# Altium PCB PCBpoprawiony.PcbDoc
Units mil, origin at the board's own origin, x right, y up, seen from the top; angles counter-clockwise.
Board outline 3100 x 3050 mil, 2 copper layers (Top Layer, Bottom Layer); 80 components, 68 nets, 328 pads, 71 vias.
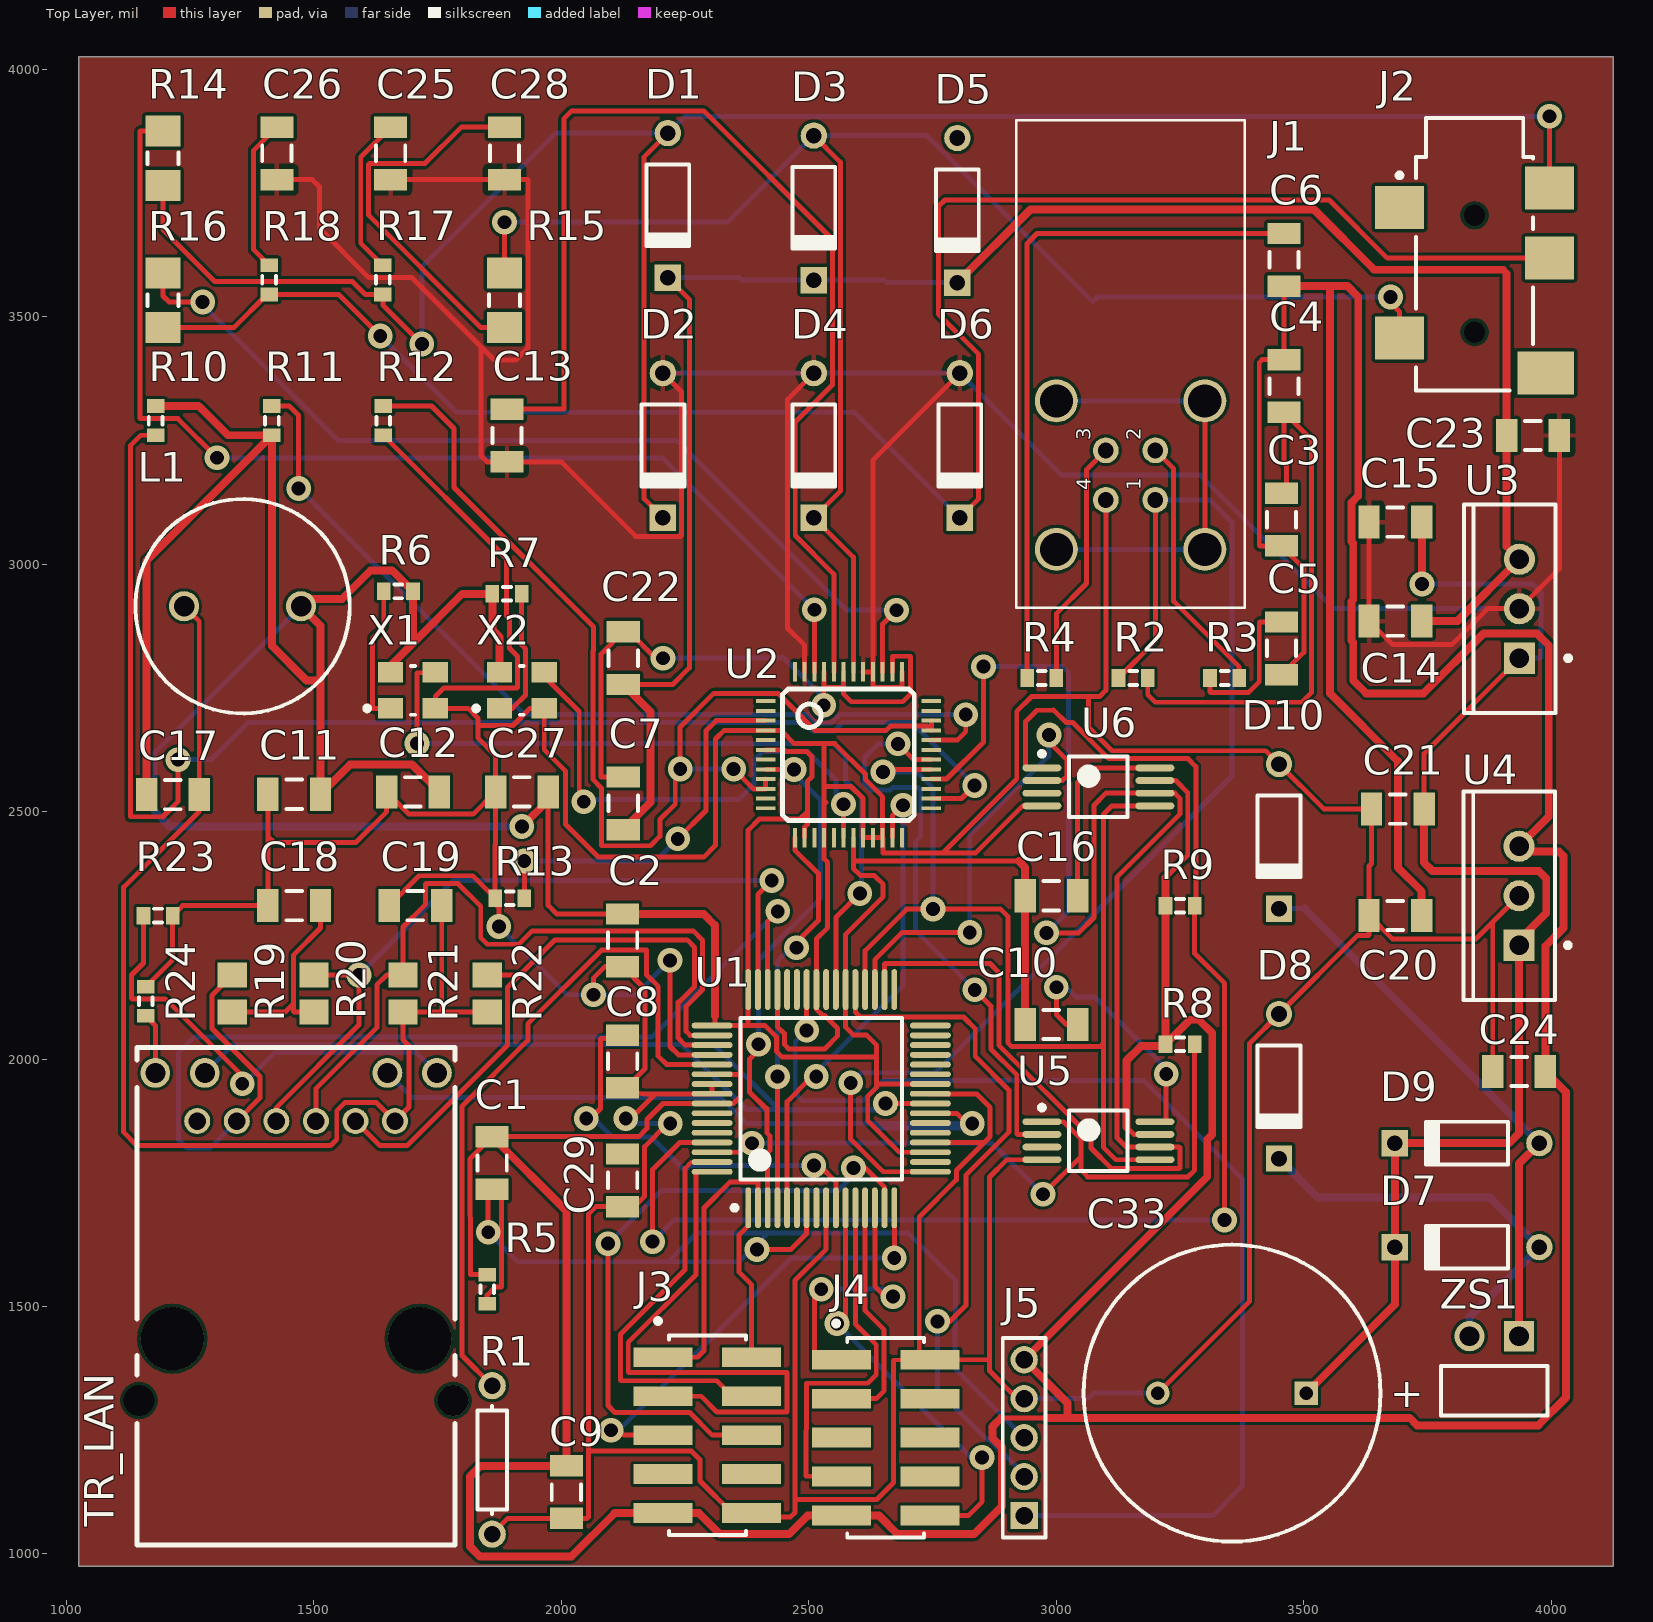
[diagram p0: Top Layer view]
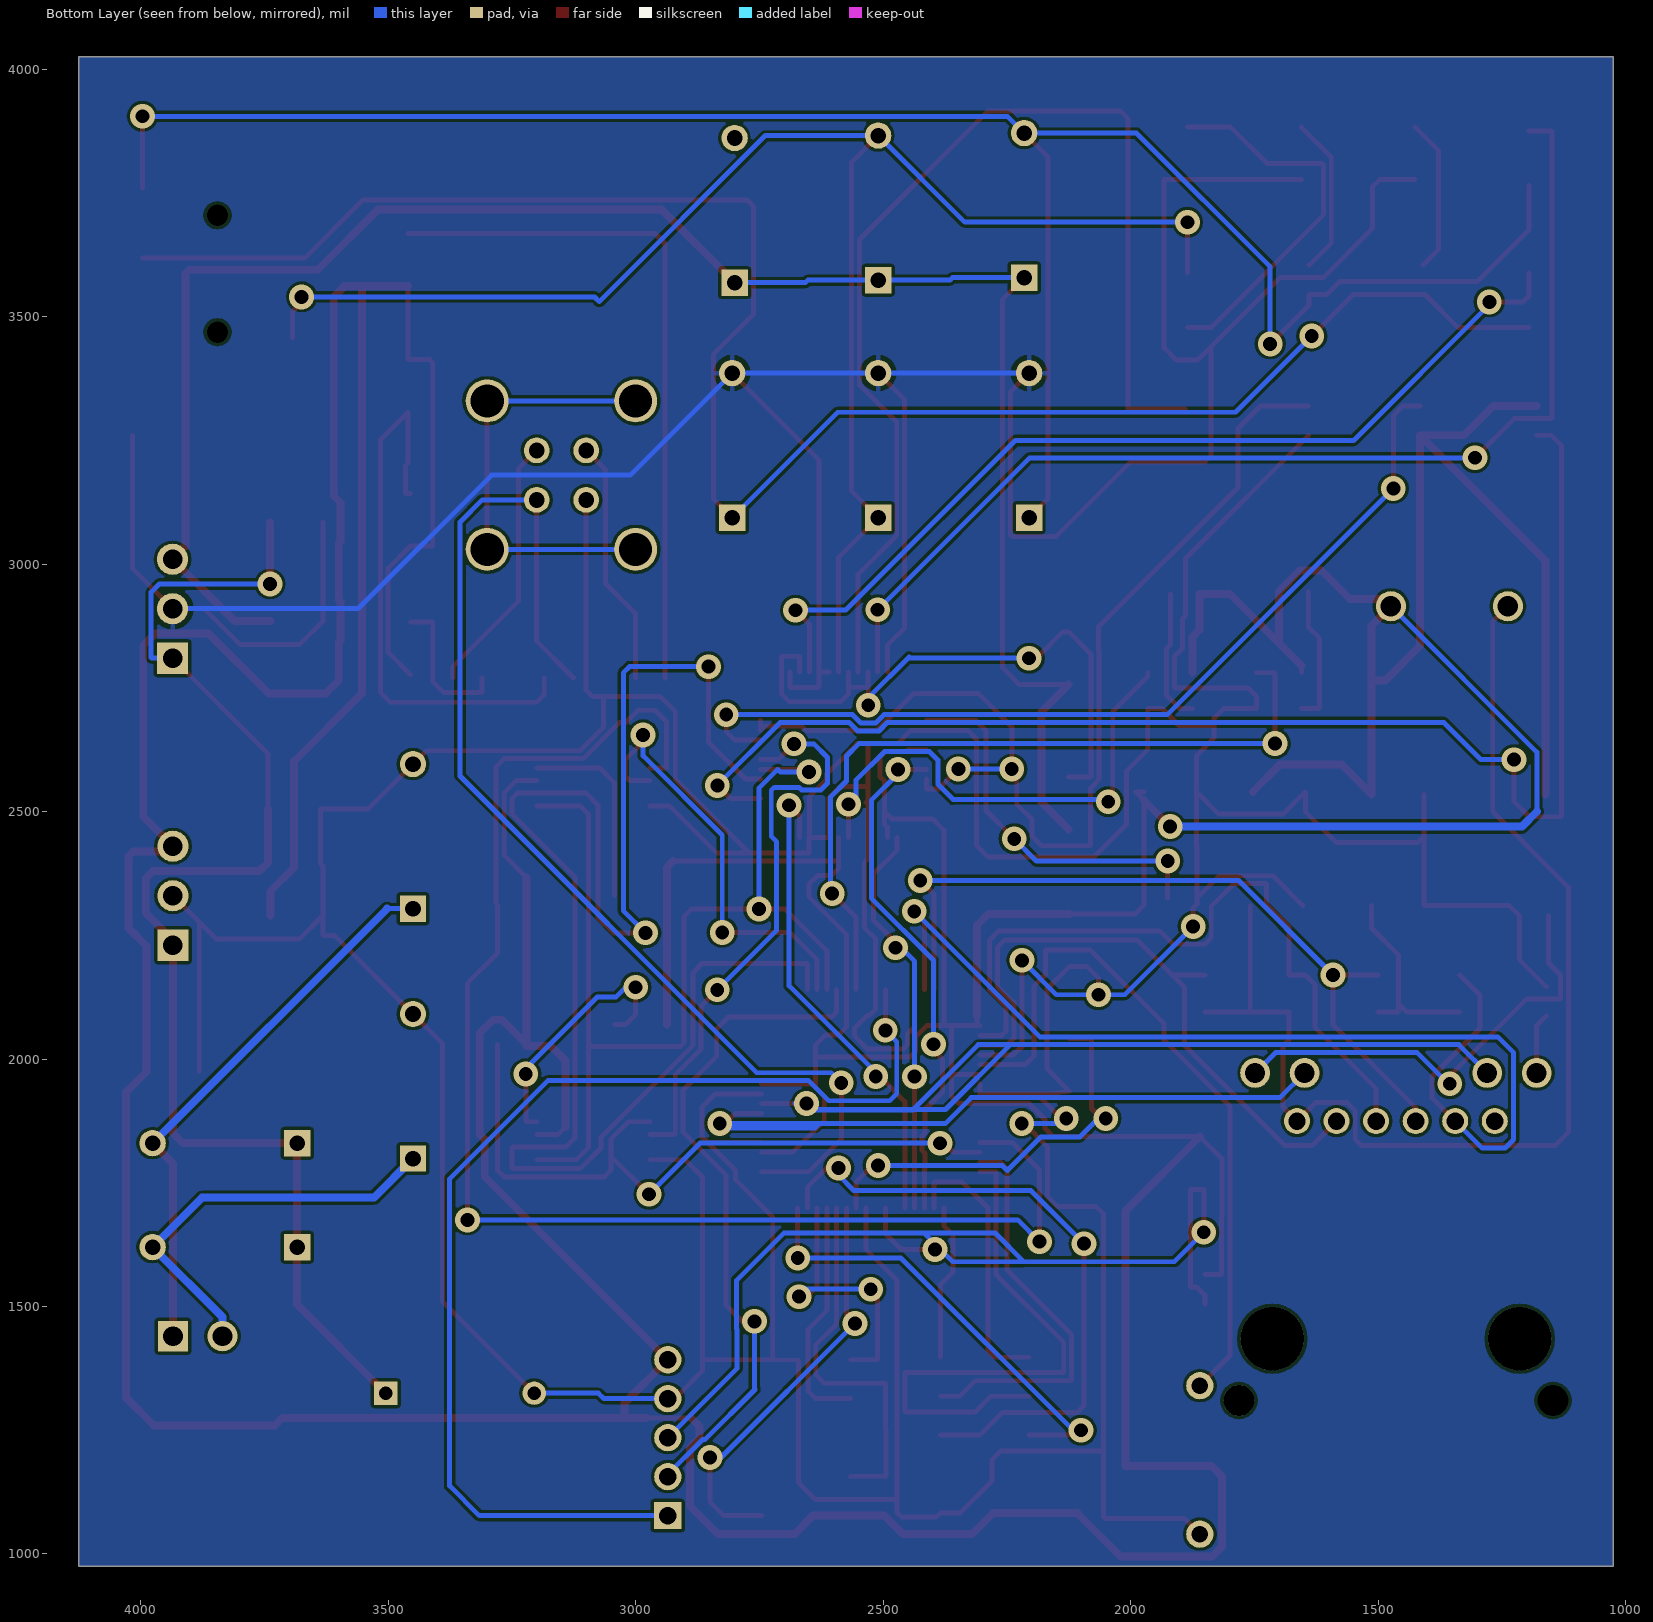
[diagram p1: Bottom Layer view, seen from below]

## Layer stack, top to bottom
Top Solder: solder mask 0.4, Solder Resist, Dk 3.5
Top Layer: signal copper 1.4
Dielectric 1: dielectric 12.6, FR-4, Dk 4.8
Bottom Layer: signal copper 1.4
Bottom Solder: solder mask 0.4, Solder Resist, Dk 3.5

## Board outline
4125,4025 1025,4025 1025,975 4125,975

## Design rules (kind name [scope] priority, off if disabled: settings)
Clearance [All] p1: gap=6 ignorepadtopadclearanceinfootprint=FALSE
HoleSize [All] p1: absolutevalues=TRUE maxlimit=128 minlimit=1 maxpercent=80.000 minpercent=20.000
MinimumSolderMaskSliver [All] p1: minsoldermaskwidth=2
PolygonConnect [All] p1: connectstyle=Relief reliefconductorwidth=10 reliefentries=4 polygonreliefangle="90 Angle" airgapwidth=10
RoutingVias [All] p1: holewidth=28 width=50 viastyle="Through Hole" minholewidth=28 minwidth=50 maxholewidth=28 maxwidth=50
SMDNeckDown [All] p1 off: percent=50.000
SilkToSilkClearance [All] p1: silktosilkclearance=0
SilkToSolderMaskClearance [IsPad] p1: minsilkscreentomaskgap=2 clearancetoexposedcopper=TRUE
SolderMaskExpansion [All] p1: expansion=2
Width [All] p1: maxlimit=24 minlimit=6 preferedwidth=10
26 further rules are at their usual default settings.

## Components (designator, comment, footprint, x,y, rotation, side; value= is the part's Value field where it differs from the comment)
C1 "100n" C1206 1860,1790 r90 top
C2 "100n" C1206 2123.66,2240 r90 top
C3 "100n" C1206 3455,3090 r90 top
C4 "100n" C1206 3460,3360 r90 top
C5 "100n" C1206 3455,2830 r90 top
C6 "100n" C1206 3460,3615 r90 top
C7 "100n" C1206 2125,2516.85 r90 top
C8 "100n" C1206 2123.66,1995.15 r90 top
C9 "100n" C1206 2010,1125 r90 top
C10 "100n" C1206 2990,2070 r0 top
C11 "100n" C1206 1460,2535 r0 top
C12 "100n" C1206 1700,2540 r0 top
C13 "100n" C1206 1890,3260 r90 top
C14 "100n" C1206 3685,2885 r0 top
C15 "100n" C1206 3685,3085 r0 top
C16 "100n" C1206 2990,2330 r0 top
C17 "100n" C1206 1215,2534.34 r0 top
C18 "100n" C1206 1460,2310 r0 top
C19 "100n" C1206 1705,2310 r0 top
C20 "100n" C1206 3685,2290 r0 top
C21 "100n" C1206 3690,2505 r0 top
C22 "10u" C1206 2125,2810 r90 top
C23 "10u" C1206 3963.15,3260 r0 top
C24 "10u" C1206 3935,1975 r0 top
C25 "10n" C1206 1654.98,3830 r90 top
C26 "10n" C1206 1424.96,3830 r90 top
C27 "10n" C1206 1920,2540 r0 top
C28 "47n" C1206 1885,3830 r90 top
C29 "1u" C1206 2123.66,1755 r90 top
C33 "Cap Pol1" RB7.6-15 3355,1325 r0 top value=1000uF
D1 "1N4147" GRZZ0002ZB-A 2215,3725 r90 top
D2 "1N4147" GRZZ0002ZB-A 2205,3240 r90 top
D3 "1N4147" GRZZ0002ZB-A 2510,3720 r90 top
D4 "1N4147" GRZZ0002ZB-A 2510,3240 r90 top
D5 "1N4147" GRZZ0002ZB-A 2800,3715 r90 top
D6 "1N4147" GRZZ0002ZB-A 2805,3240 r90 top
D7 "1N4147" GRZZ0002ZB-A 3830,1620 r0 top
D8 "1N4147" GRZZ0002ZB-A 3450,1945 r90 top
D9 "1N4147" GRZZ0002ZB-A 3830,1830 r0 top
D10 "1N4147" GRZZ0002ZB-A 3450,2450 r90 top
J1 "KEY" EPC.0B.304.HLNS 3150,3180 r90 top
J2 "HPHONE" PJ-386D 3845,3705 r270 top
J3 "SD" SMTC-TW-05-07-X-D-500-SM 2295,1240 r270 top
J4 "DISP" SMTC-TW-05-07-X-D-500-SM 2655,1235 r270 top
J5 "ICSP" SMTC-TW-05-09-X-S-260-100 2935,1077.52 r90 top
L1 "10nH" COIL-RFB1010-2_V 1355.75,2915 r0 top
R1 "2.26K" AXIAL-0.3 1860,1190 r90 top
R2 "10K" J1-0603 3155.24,2770 r0 top
R3 "10K" J1-0603 3340,2770 r0 top
R4 "10K" J1-0603 2970.47,2770 r0 top
R5 "10K" J1-0603 1850,1535 r90 top
R6 "10K" J1-0603 1670.47,2945 r0 top
R7 "R5" J1-0603 1890,2940 r0 top value=10K
R8 "10K" J1-0603 3250,2030 r0 top
R9 "10K" J1-0603 3250,2310 r0 top
R10 "10K" J1-0603 1180,3290 r90 top
R11 "10K" J1-0603 1415,3290 r90 top
R12 "10K" J1-0603 1640,3290 r90 top
R13 "47K" J1-0603 1895.47,2325 r0 top
R14 "10" 8RB-1206 1195,3820.09 r90 top
R15 "10" 8RB-1206 1885.06,3533.15 r90 top
R16 "10" 8RB-1206 1195,3533.15 r90 top
R17 "20" J1-0603 1639.23,3574.56 r90 top
R18 "20" J1-0603 1409.21,3574.55 r90 top
R19 "49.9" 6-0805 1335,2132.6 r90 top
R20 "49.9" 6-0805 1500,2132.6 r90 top
R21 "49.9" 6-0805 1680,2132.6 r90 top
R22 "49.9" 6-0805 1850,2132.6 r90 top
R23 "R5" J1-0603 1185,2290 r0 top value=220
R24 "R5" J1-0603 1160,2116.82 r90 top value=220
TR_LAN "08B0-1X1T-06-F" RJ45 1464.25,1520.35 r180 top (schematic designator C32)
U1 "PIC18F67J60" TQFP-PT64_M 2525,1920 r90 top
U2 "VS1011" LQFP-48 2580,2615 r270 top
U3 "LM2937" NDE0003A 3935.59,2910 r90 top
U4 "LM2937" NDE0003A 3935,2330 r90 top
U5 "23K256" TSSOP-ST8_M 3085,1835 r0 top
U6 "23K256" TSSOP-ST8_M 3085,2550 r0 top
X1 "25Mhz" AVX-CX3225GB-4_V 1700,2745 r0 top
X2 "24Mhz" AVX-CX3225GB-4_V 1920,2745 r0 top
ZS1 "" SMTC-TSW-102-08-X-S-RA 3935,1440 r180 top

## Footprints (in the part's own frame and the unit in brackets; to place one, negate y for a bottom-side part, rotate by r counter-clockwise, add the part's x,y. Pads: shape width x height; smd on the part's side, far side on the other; paste and mask are expansions set on the pad)
6-0805 [mm] "Chip Resistor; Body 2 x 1.2 mm (LxW typ)"
  rect 1.3x1.5 smd: 1(-0.95,0) 2(0.95,0)
8RB-1206 [mm] "Chip Resistor; Body 3.2 x 1.6 mm (LxW typ)"
  rect 1.6x1.8 smd: 1(-1.4,0) 2(1.4,0)
  silkscreen extent -0.3,-0.8 0.3,0.8
AVX-CX3225GB-4_V [mm] "SMD, 4-Leads, Body 3.2x2.5mm, Height 0.9mm"
  rect 1.3x1.05 smd: 1(-1.15,-0.925) 2(1.15,-0.925) 3(1.15,0.925) 4(-1.15,0.925)
  silkscreen extent -2.47,-1.25 0.1,1.25, body extent -1.6,-1.25 1.6,1.25, height 0.9
AXIAL-0.3 [mm] "Axial Device, Thru-Hole; 2 Leads; 0.3 in Pin Spacing"
  round 1.4 hole 0.85: 1(-3.81,0) 2(3.81,0)
  silkscreen extent -2.77,-0.76 2.77,0.76
C1206 [mm] "Chip Capacitor, Body 3.2x1.6mm, IPC High Density"
  rect 1.1x1.7 smd: 1(-1.35,0) 2(1.35,0)
  silkscreen extent -0.4,-0.75 0.4,0.75, body extent -1.7,-0.9 1.7,0.9, height 1.3
COIL-RFB1010-2_V [mm] "Radial Leaded, 2-Leads, Dia 11mm, Height 11.5mm, Pin Spacing 6mm"
  round 1.55 hole 1.05: 1(-3,0) 2(3,0)
  Mechanical 13 keep-out circle w0.1: c0,0 r5.5
  silkscreen extent -5.5,-5.5 5.5,5.5, body extent -5.5,-5.5 5.5,5.5, height 11.5
EPC.0B.304.HLNS [mil] "Socket, Female, Height 11.7 mm, Through hole"
  round 52 hole 32: 1(-50,-50) 2(50,-50) 3(50,50) 4(-50,50)
  round 87 hole 67: 6(-150,-150) 7(150,-150) 8(150,150) 9(-150,150)
  silkscreen extent -268,-230 717,231, body extent -259,-230 725,230, height 500
GRZZ0002ZB-A [mm] "Diode, Axial; Body 4.2 x 2.2 mm (LxDia. max), Lead Dia. 0.5 mm (nom)"
  rect 1.35x1.35 hole 0.8: 1(-3.71,0)
  round 1.35 hole 0.8: 2(3.71,0)
  silkscreen extent -2.2,-1.1 2.1,1.1, body extent -2.1,-1.1 2.1,1.1, height 2.2
J1-0603 [mm] "Chip Resistor, Body 1.6x0.8mm, IPC High Density"
  rect 0.7x0.9 smd: 1(-0.75,0) 2(0.75,0)
  silkscreen extent -0.2,-0.35 0.2,0.35, body extent -0.85,-0.48 0.85,0.48, height 0.9
LQFP-48 [mm]
  rect 0.2x1 smd paste-25.4 mask-25.4: 1(-2.75,-4.25) 2(-2.25,-4.25) 3(-1.75,-4.25) 4(-1.25,-4.25) 5(-0.75,-4.25) 6(-0.25,-4.25) 7(0.25,-4.25) 8(0.75,-4.25) 9(1.25,-4.25) 10(1.75,-4.25) 11(2.25,-4.25) 12(2.75,-4.25) 25(2.75,4.25) 26(2.25,4.25) 27(1.75,4.25) 28(1.25,4.25) 29(0.75,4.25) 30(0.25,4.25) 31(-0.25,4.25) 33(-1.25,4.25) 34(-1.75,4.25) 35(-2.25,4.25) 36(-2.75,4.25)
  rect 1x0.2 smd paste-25.4 mask-25.4: 13(4.25,-2.75) 14(4.25,-2.25) 15(4.25,-1.75) 16(4.25,-1.25) 17(4.25,-0.75) 18(4.25,-0.25) 19(4.25,0.25) 20(4.25,0.75) 21(4.25,1.25) 22(4.25,1.75) 23(4.25,2.25) 24(4.25,2.75) 37(-4.25,2.75) 38(-4.25,2.25) 39(-4.25,1.75) 40(-4.25,1.25) 41(-4.25,0.75) 42(-4.25,0.25) 43(-4.25,-0.25) 44(-4.25,-0.75) 45(-4.25,-1.25) 46(-4.25,-1.75) 47(-4.25,-2.25) 48(-4.25,-2.75)
  rect 0.2x1 smd mask-25.4: 32(-0.75,4.25)
  silkscreen extent -3.37,-3.37 3.37,3.37
NDE0003A [mm] "FM, 3-Leads, Body 10.7x4.7mm, Pitch 2.54mm"
  rect 1.6x1.6 hole 1: 1(-2.54,0)
  round 1.6 hole 1: 2(0,0) 3(2.54,0)
  silkscreen extent -5.35,-2.63 5.35,2.85, body extent -5.4,-1.9 5.4,2.9, height 19.4
PJ-386D [mm] "Phone Jack, Right Angle, SM, Body 14x6x4.8mm (LxWxH)"
  rect 2.2x2.5 smd: 1(-0.4,-3.85) 2(6.3,-3.85) 3(2.2,3.85) 4(-1.4,3.85)
  rect 2.2x2.9 smd: 10(8.1,3.65)
  round 0.8 hole 1.1 unplated: MH1(0,0) MH2(6,0)
  silkscreen extent -5,-3.97 9,3, body extent -5,-3 9,3, height 4.87
RB7.6-15 [mm] "Polarized Capacitor (Radial); 2 Leads"
  rect 1.2x1.2 hole 0.7: 1(3.81,0)
  round 1.2 hole 0.7: 2(-3.81,0)
  silkscreen extent -7.62,-7.62 7.62,7.62
RJ45 [mm]
  round 1.335 hole 0.89: 1(-5.065,-9) 2(-3.035,-9) 3(-1.005,-9) 4(1.025,-9) 5(3.055,-9) 6(5.085,-9)
  round 1.53 hole 1.02: 7(-7.215,-11.47) 8(-4.675,-11.47) 9(4.695,-11.47) 10(7.235,-11.47)
  round 1.57 hole 1.57 unplated: ""(-8.045,5.34)
  round 3.25 hole 3.25 unplated: ""(-6.335,2.17) ""(6.365,2.17)
  round 1.524 hole 1.57 unplated: ""(8.075,5.34)
  silkscreen extent -8.15,-12.77 8.16,12.76, body extent -8.27,-12.9 8.3,12.9, height 13.42
SMTC-TSW-102-08-X-S-RA [mm] ".025 SQ Post Terminal Strip Assembly, 1x2 Pins, Right Angle, 2.54mm Pitch, Male"
  rect 1.55x1.55 hole 1.02: 1(0,0)
  round 1.55 hole 1.02: 2(2.54,0)
  silkscreen extent -1.46,1.52 4,4.06, body extent -1.27,-0.32 3.81,9.9, height 3.05
SMTC-TW-05-07-X-D-500-SM [mm] "SMT Board Stacking Terminal Strip ASM, 2x5 Pins, Vertical, 2mm Pitch, Male"
  rect 1.02x3.025 smd: 1(-4,-2.272) 2(-4,2.272) 3(-2,-2.272) 4(-2,2.272) 5(0,-2.272) 6(0,2.272) 7(2,-2.272) 8(2,2.272) 9(4,-2.272) 10(4,2.272)
  silkscreen extent -5.98,-2.66 5.12,1.97, body extent -5,-3.37 5,3.37, height 17.35
SMTC-TW-05-09-X-S-260-100 [mm] "Terminal Strip, 1x5 Pins, Vertical, 2mm Pitch, Male"
  rect 1.4x1.4 hole 0.89: 1(0,0)
  round 1.4 hole 0.89: 2(2,0) 3(4,0) 4(6,0) 5(8,0)
  silkscreen extent -1.13,-1.1 9.13,1.1, body extent -1,-0.99 9,0.99, height 9.04
TQFP-PT64_M [mm] "Thin QFP, 64-Leads, Body 10x10mm, Pitch 0.5mm, IPC Low Density"
  oval 2.1x0.3 smd: 1(-5.6,3.75) 2(-5.6,3.25) 3(-5.6,2.75) 4(-5.6,2.25) 5(-5.6,1.75) 6(-5.6,1.25) 7(-5.6,0.75) 8(-5.6,0.25) 9(-5.6,-0.25) 10(-5.6,-0.75) 11(-5.6,-1.25) 12(-5.6,-1.75) 13(-5.6,-2.25) 14(-5.6,-2.75) 15(-5.6,-3.25) 16(-5.6,-3.75) 33(5.6,-3.75) 34(5.6,-3.25) 35(5.6,-2.75) 36(5.6,-2.25) 37(5.6,-1.75) 38(5.6,-1.25) 39(5.6,-0.75) 40(5.6,-0.25) 41(5.6,0.25) 42(5.6,0.75) 43(5.6,1.25) 44(5.6,1.75) 45(5.6,2.25) 46(5.6,2.75) 47(5.6,3.25) 48(5.6,3.75)
  oval 0.3x2.1 smd: 17(-3.75,-5.6) 18(-3.25,-5.6) 19(-2.75,-5.6) 20(-2.25,-5.6) 21(-1.75,-5.6) 22(-1.25,-5.6) 23(-0.75,-5.6) 24(-0.25,-5.6) 25(0.25,-5.6) 26(0.75,-5.6) 27(1.25,-5.6) 28(1.75,-5.6) 29(2.25,-5.6) 30(2.75,-5.6) 31(3.25,-5.6) 32(3.75,-5.6) 49(3.75,5.6) 50(3.25,5.6) 51(2.75,5.6) 52(2.25,5.6) 53(1.75,5.6) 54(1.25,5.6) 55(0.75,5.6) 56(0.25,5.6) 57(-0.25,5.6) 58(-0.75,5.6) 59(-1.25,5.6) 60(-1.75,5.6) 61(-2.25,5.6) 62(-2.75,5.6) 63(-3.25,5.6) 64(-3.75,5.6)
  silkscreen extent -5.72,-4.15 4.15,4.57, body extent -5,-5 5,5, height 1.6
TSSOP-ST8_M [mm] "TSOP, 8-Leads, Body 3x4.4mm, Pitch 0.65mm, IPC Low Density"
  oval 2x0.35 smd: 1(-2.9,0.975) 2(-2.9,0.325) 3(-2.9,-0.325) 4(-2.9,-0.975) 5(2.9,-0.975) 6(2.9,-0.325) 7(2.9,0.325) 8(2.9,0.975)
  silkscreen extent -3.02,-1.55 1.5,1.82, body extent -2.25,-1.55 2.25,1.55, height 1.2

## Part data
C1 C2 C3 C4 C5 C6 C7 C8 C9 C10 C11 C12 C13 C14 C15 C16 C17 C18 C19 C20 C21 C22 C23 C24 C25 C26 C27 C28 C29: library part "Cap Semi", "Capacitor (Semiconductor SIM Model)", LatestRevisionDate=29-May-2009, LatestRevisionNote="IPC-7351 Footprint Added.", PackageDescription="Chip Capacitor", PackageReference=C1206, Published=8-Jun-2000, Publisher="Altium Limited"
C33: "Polarized Capacitor (Radial)", LatestRevisionDate=17-Jul-2002, LatestRevisionNote="Re-released for DXP Platform.", PackageDescription="Polarized Capacitor (Radial); 2 Leads", PackageReference=RB7.6-15, Published=8-Jun-2000, Publisher="Altium Limited"
D1 D2 D3 D4 D5 D6 D7 D8 D9 D10: library part 1N4148, "Silicon Epitaxial Planar Diode for Various Detector, Modulator, Demodulator", Code_JEITA=SC-40, ComponentLink1Description="Manufacturer Link", ComponentLink1URL=http://sg.renesas.com/fmwk.jsp?cnt=diode_landing.jsp&fp=/products/discrete/diodes/, ComponentLink2Description=Datasheet, ComponentLink2URL=http://documentation.renesas.com/eng/products/diode/rej03g0556_1n4148.pdf, ComponentLink3Description="Packaging Specification", ComponentLink3URL=http://sg.renesas.com/media/products/common_info/package/pdf/diode/code/grzz0002zb_a.pdf, DatasheetVersion="Rev.5.00, Jul-2006", PackageDescription="Diode, Axial; Body 4.2 x 2.0 mm (LxDia.), Lead Dia. 0.5 mm (nom)", PackageReference=GRZZ0002ZB-A, PackageVersion=Aug-2005, Published=12-Feb-2010, Publisher="Altium Limited"
J1: library part CMP-1505-00274-1, "Elbow receptacle for printed circuit (solder or screw fixing), Key (C), 0B series, Multipole Type with 4 Contacts", Manufacturer=LEMO, PartNumber=EPC.0B.304.HLNS, Rated Current(A)=6, AWG=24, ComponentLink1Description="Manufacturer URL", ComponentLink1URL=http://www.lemo.com, ComponentLink2Description=Datasheet, ComponentLink2URL=http://intra.lemo.ch/catalog/ROW/UK_English/unipole_multipole.pdf, Contact Diameter="0.7 mm", DatasheetVersion=Jun-14, Number of contacts=4, PackageDescription="Elbow receptacle for printed circuit (solder or screw fixing), Key(C) for Printed Circuit", PackageReference=EPC.0B.304.HLNS
J2: library part TSH-3864D, "Phone Jack, PJ-386D Series, Right Angle, SM, 4-Conductor Open Circuit", ComponentLink1Description="Manufacturer Link", ComponentLink1URL=http://www.contactswitch.com/, ComponentLink2Description=Datasheet, ComponentLink2URL=http://www.contactswitch.com/uploads/product/pdf_file_193.pdf, DatasheetVersion="revA, 2006", DrillSize="Corresponds to nominal value.", PackageDescription="PJ-386D Series Phone Jack, Right Angle, SM, Body 14 x 6 x 4.8 mm (LxWxH)", PackageReference=PJ-386D, PackageVersion="revA, 2006", PCB_Layout="Complies with manufacturer's recommendation.", Published=30-May-2008, Publisher="Altium Limited"
J3 J4: library part CMP-1029-00393-1, "SMT Board Stacker, Vertical, -55 to 125 degC, 2 mm Pitch, 10-Pin, Male, RoHS", Manufacturer=Samtec, PartNumber=TW-05-07-F-D-500-SM, Temperature Range="-55 to 125 degC", ComponentLink1Description="Manufacturer URL", ComponentLink1URL=http://www.samtec.com, ComponentLink2Description=Datasheet, ComponentLink2URL=http://d2a072wq521u33.cloudfront.net/catalog_english//TW_SM.PDF, ComponentLink3Description="Package Specification", ComponentLink3URL=http://www.samtec.com/documents/webfiles/cpdf/TW-XX-XX-XXX-X-XXX-SM-XXX-XX-MKT1.pdf, DatasheetVersion=F-214, Mounting Technology="Surface Mount", Orientation=Vertical, PackageDescription="High Temp 2mm SMT Board Stacking Terminal Strip ASM", PackageReference=TW-05-07-X-D-500-SM, PackageVersion="CL, 3/1993", Pitch="2 mm", RoHS=True
J5: library part CMP-1029-00402-1, "Through-Hole Board Stacker, Vertical, -55 to 125 degC, 2 mm Pitch, 5-Pin, Male, RoHS", Manufacturer=Samtec, PartNumber=TW-05-09-F-S-260-100, Temperature Range="-55 to 125 degC", ComponentLink1Description="Manufacturer URL", ComponentLink1URL=http://www.samtec.com, ComponentLink2Description=Datasheet, ComponentLink2URL=http://d2a072wq521u33.cloudfront.net/catalog_english//TW_TH.PDF, ComponentLink3Description="Package Specification", ComponentLink3URL=http://www.samtec.com/documents/webfiles/cpdf/TW-XX-XX-X-X-XXX-XXX-XXX-XX-MKT2.pdf, DatasheetVersion=F-214, Mounting Technology=Through-hole, Orientation=Vertical, PackageDescription="High Temp 2mm Terminal Strip(Board Stacking)", PackageReference=TW-05-09-X-S-260-100, PackageVersion="BF, 6/1998", Pitch="2 mm", RoHS=True
L1: library part CMP-0899-00020-1, "Power Inductor, 56 uH +/- 10%, 2.6 A, -40 to 125 degC, 2-Pin Radial Leaded, Dia 11 mm, RoHS, Tray", Ambient Temperature Range="-40 to 125 degC", Inductance="56 uH", Manufacturer=Coilcraft, PartNumber=RFB1010-560L, Tolerance=10%, ComponentLink1Description="Manufacturer URL", ComponentLink1URL=http://www.coilcraft.com/, ComponentLink2Description=Datasheet, ComponentLink2URL=http://www.coilcraft.com/pdfs/rfb.pdf, DatasheetVersion=Sep-13, DCR="0.09 Ohm Max.", Irms="3.2 A @40 degC", Isat="2.6 A", Mounting Technology="Through Hole", PackageDescription="2-Pin Radial Leaded, Dia 11 mm, Height 11.5 mm, Radial 6 mm", PackageReference=RFB1010-2, Packing=Tray, RoHS=TRUE, SRF="8.6 MHz"
R1: library part Res1, "Resistor", LatestRevisionDate=17-Jul-2002, LatestRevisionNote="Re-released for DXP Platform.", PackageDescription="Axial Device, Thru-Hole; 2 Leads; 0.3 in Pin Spacing", PackageReference=AXIAL-0.3, Published=8-Jun-2000, Publisher="Altium Limited"
R2 R3 R4 R5 R6 R7 R8 R9 R10 R11 R12 R13 R17 R18 R23 R24: library part Res3, "Resistor", LatestRevisionDate=29-May-2009, LatestRevisionNote="IPC-7351 Footprint Added.", PackageDescription="Chip Resistor", PackageReference=J1-0603, Published=8-Jun-2000, Publisher="Altium Limited"
R14 R15 R16: library part ERJ8BQ, "Low Ohmic Value Thick Film Chip Resistor, 0.22 Ohm to 9.1 Ohm Range, 1%, 2% and 5% Tolerance, 1206 Size, 0.33 W", PackageDocument=Mar-2003, Code_IPC="3216 [1206]", ComponentLink1Description="Manufacturer Link", ComponentLink1URL=http://www.panasonic.com/industrial/components/resistive_products.htm, ComponentLink2Description=Datasheet, ComponentLink2URL=http://www.panasonic.com/industrial/components/pdf/AOA0000CE3.pdf, LatestRevisionDate=19-Mar-2004, LatestRevisionNote="Silkscreen size reduced.", PackageReference=8RB-1206, Published=17-Dec-2003, Publisher="Altium Limited"
R19 R20 R21 R22: library part ERJ6BQ, "Low Ohmic Value Thick Film Chip Resistor, 0.22 Ohm to 9.1 Ohm Range, 1%, 2% and 5% Tolerance, 0805 Size, 0.25 W", PackageDocument=Mar-2003, Code_IPC="2012 [0805]", ComponentLink1Description="Manufacturer Link", ComponentLink1URL=http://www.panasonic.com/industrial/components/resistive_products.htm, ComponentLink2Description=Datasheet, ComponentLink2URL=http://www.panasonic.com/industrial/components/pdf/AOA0000CE3.pdf, LatestRevisionDate=19-Mar-2004, LatestRevisionNote="Silkscreen size reduced.", PackageReference=6-0805, Published=17-Dec-2003, Publisher="Altium Limited"
TR_LAN: Supplier Part Number 1=507-1445-ND, HELPURL=http://belfuse.com/pdfs/08B0-1X1T-06-F.pdf, Supplier 1=Digikey
U1: library part CMP-0116-00618-1, "High Performance, 1-Mbit Flash Microcontroller with Ethernet, 128K Flash, 64-Pin TQFP, Industrial Temperature Range, Tape and Reel", Code_JEDEC=MS-026, DatasheetVersion="revE, Oct-2009", PackageDescription="64-Lead Thin Plastic Quad Flat Pack (PT) - 10x10x1mm Body, 2.00mm [TQFP]", PackageReference=TQFP-PT64, PackageVersion="revBB, Aug-2009"
U3 U4: library part CMP-0062-02520-3, "400mA and 500mA Voltage Regulator, 3-pin TO-220, Pb-Free", Manufacturer="Texas Instruments", PackageTopMarking=NSUZXYTTE#*LM2937ET*-3.3, PowerWise=N, ComponentLink1Description="Datasheet URL", ComponentLink1URL=http://www.ti.com/general/docs/lit/getliterature.tsp?genericPartNumber=LM2937-3.3&fileType=pdf, CompType="LDO IC", PackageDescription="TO-220, Molded, 3 Lead, Straight", PackageReference=NDE0003A, PinCount=3, RoHS=Y
U5 U6: library part CMP-0163-00021-1, "256K, 32768x8-bit, 3.6V SPI Serial SRAM, 8-Pin TSSOP, Extended TemperatureTape and Reel", Code_JEDEC=MO-153, DatasheetVersion="revD, Apr-2009", PackageDescription="8-Lead Plastic Thin Shrink Small Outline (ST) - 4.4mm Body [TSSOP]", PackageReference=TSSOP-ST8, PackageVersion="revBB, Aug-2009"
X1 X2: library part CMP-0614-00001-1, "Crystal Unit, 8 pF, 25000 kHz, -10 to 70 degC, 4-Pin 3.2 x 2.5 x 0.8 mm SMD, RoHS, Tape and Reel", Frequency="25000 kHz", Frequency Tolerance="+/- 20 x 10^(-6)", Load Capacitance="8 pF", Manufacturer=Kyocera, Operationg Temperature="-10 to 70 degC", PartNumber=CX3225GB25000D0HEQCC, ComponentLink1Description="Manufacturer URL", ComponentLink1URL=http://global.kyocera.com/, ComponentLink2Description=Datasheet, ComponentLink2URL=http://global.kyocera.com/prdct/electro/pdf/xtal/cx3225gb_cs_e.pdf, ComponentLink3Description="Package Specification", ComponentLink3URL=http://global.kyocera.com/prdct/electro/pdf/xtal/cx3225gb_cs_e.pdf, DatasheetVersion=Sep-13, Mounting Technology="Surface Mount", PackageDescription="4-Pin SMT, Body 3.2 x 2.5 mm, Height 0.9 mm", PackageReference=CX3225GB-4, PackageVersion=Sep-13, Packing="Tape and Reel", RoHS=TRUE, Series=CX3225GB
ZS1: library part CMP-1024-00320-1, Manufacturer=Samtec, PartNumber=TSW-102-08-G-S-RA, Temperature Range="-55 to 125 degC", ComponentLink1Description="Manufacturer URL", ComponentLink1URL=http://www.samtec.com, ComponentLink2Description=Datasheet, ComponentLink2URL=http://www.samtec.com/documents/webfiles/pdf/TSW_TH.PDF, ComponentLink3Description="Package Specification", ComponentLink3URL=http://www.samtec.com/documents/webfiles/cpdf/TSW-XXX-XX-XXX-X-XX-XXX-MKT.pdf, DatasheetVersion=F-214, Mounting Technology=Through-hole, Orientation="Right Angle", PackageDescription=".025[0.64] SQ. Post Terminal Strip Assembly", PackageReference=TSW-102-08-X-S-RA, PackageVersion="DM, 8/1988", Pitch="2.54 mm", RoHS=True
U2: HELPURL=http://www.vlsi.fi/fileadmin/datasheets/vs1011.pdf

## Via types
v1: diameter 50, hole 28, Top Layer to Bottom Layer, 71 vias

## Nets (pads, with @x,y where several pads share a name; then routed paths per layer and width w, separated by ;. In a path a pad name is that pad's centre, name@x,y a point inside that pad or via, vN(x,y) a via of type N, cw(c..) or ccw(c..) an arc to the next point about the centre after c; other vN are vias at no path point)
+3.3VA: C7.1 C14.2 C22.1 C23.1 D1.1 D3.1 D5.1 U3.3 | length 3944
  Top Layer w10: C22.1 2225,2756.85 2258.58,2790.43 2258.58,3535.36 D1.1 ; 3902.5,3595 3910,3587.5 ; 3910,3035.59 U3.3
  Top Layer w16: C7.1 2180,2518.7 2180,2701.85 C22.1 ; D5.1 2947.87,3716.81 3520.47,3716.81 3642.27,3595 3902.5,3595 ; C14.2 3810.59,2885 U3.3 ; 3910,3035.59 C23.1 3910,3587.5
  Bottom Layer w10: D1.1 2360,3578.94 2365,3573.94 D3.1 2652,3573.94 2657,3568.94 D5.1
+3.3VD: C1.2 C2.2 C3.1 C4.2 C5.1 C6.1 C9.2 C10.1 C11.2 C12.2 C16.1 C17.1 C20.2 C24.2 C27.2 J3.9 J4.9 J5.5 L1.2 R5.2 R6.2 R7.1 R8.1 R9.1 R10.2 R11.1 U1.19 U1.26 U1.38 U1.48 U1.49 U1.54 U1.57 U2.6 U2.14 U2.19 U4.3 U5.7 U6.7 X1.4 X2.4 | length 20143.6
  Top Layer w10: L1.2 L1.2@1473.86,2930 ; X1.4 X1.4@1654.73,2795 ; R5.2 1816,1564.53 1815,1798.15 C1.2 2156.15,1843.15 2172.9,1859.9 2172.9,1877.9 2205.16,1910.16 U1.57 2347.16,1910.16 2362,1925 2362,1970.21 ; C27.2 1990,2540 1973.15,2523.15 1973.15,2310.61 1990.61,2293.15 C2.2 ; U1.49@2304,2067.64 U1.49 2360,2067.64 ; U1.54 2361,1969.21 2362,1970.21 ; 2310,2073.64 2310,2086.7 ; U2.6 2450,2624.84 2453.37,2621.47 2496,2621.47 2506,2611.47 2506,2570.09 2497,2561.09 2497,2500 ; U2.14 2491.42,2468.58 2497,2474.16 2497,2500 ; U2.19 2589.84,2400 ; 2637,1947.06 2637,1942.91 2619,1924.91 2619,1875.58 2682.84,1811.73 U1.19 ; 2637,1952 2637,2005 ; 2640,1949.77 2640.25,1949.53 U1.26 ; 2888.5,1275 2978.56,1275 ; 2924.35,2400 2589.84,2400 ; 3022.48,1277.52 3025,1275 ; 3142,1862.5 3156.71,1847.79 U5.7 ; U6.7 3241.21,2562.79 3265.54,2538.46 3265.54,2411.54 3220.47,2366.47 ; R8.1@3220.47,2026 R8.1 ; C5.1 3500,2821.85 3500,2991.85 C3.1 3411,3036.85 3410,3037.85 3410,3407.15 3416,3413.15 C4.2 C6.1 ; U4.3 U4.3@3945.38,2419.62 ; 2360,2067.64 2375,2067.64 ; 2360,2067.64 2362,2065.64 2362,1970.21 ; 2375,2067.64 2377.36,2070 U1.48 2377.36,2462.5 2399.86,2485 2482,2485 2497,2500 ; 2375,2067.64 2411.6,2067.64 2434.32,2044.91 2434.32,2015.68 2445.5,2004.5 2636.5,2004.5 2637,2005 ; 2589.84,2400 2589.84,2385.16 2604.5,2370.5 2632.5,2370.5 2650,2353 2650,2328 2574.21,2252.21 U1.38 2574.21,2064.5 2589.91,2048.8 2616.2,2048.8 2637,2028 2637,2005
  Top Layer w16: C17.1 1161.85,3007.32 R11.1 ; R10.2 1267,3319.53 1326.05,3260.47 R11.1 ; L1.2 1513.15,2875.71 1513.15,2765 ; L1.2@1473.86,2930 1557,2930 1614.5,2987.5 1657.5,2987.5 R6.2 1700,2840.27 ; X1.4@1654.73,2795 1700,2840.27 ; C12.2 1698.15,2595 1573.15,2595 C11.2 1513.15,2765 ; C1.2 2010,1693.15 C9.2 1836.65,1178.15 1815,1156.5 1815,1015 1835,995 2020,995 2107.52,1082.52 J3.9 2278,1082.52 2320.52,1040 2460,1040 2497.52,1077.52 J4.9 2641.48,1077.52 2679,1040 2833.5,1040 2890,1096.5 2890,1215 2871.02,1233.98 2871.02,1257.52 2888.5,1275 ; X2.4 1874.72,2853 1860.47,2867.25 R7.1 1799.73,2940 1700,2840.27 ; v1(1920,2470) C27.2@1973.15,2523.15 ; C2.2 2287.5,2293.15 2310,2270.65 2310,2086.7 ; 2924.35,2400 2936.85,2387.5 C16.1 C10.1 ; 2978.56,1275 3025,1275 3713.89,1275 3728.89,1260 3974,1260 4030,1316 4030,1933.15 C24.2 3988.15,2228.15 4025,2265 4025,2410 4015.38,2419.62 U4.3@3945.38,2419.62 ; 3022.48,1277.52 3022.48,1305 J5.5 3305,1762.48 3305,1837.48 3315,1847.48 3315,2052.5 3288,2079.5 3269.97,2079.5 R8.1 R9.1 3220.47,2366.47 ; 3142,1862.5 3142,1997 3171,2026 R8.1@3220.47,2026 ; C6.1 3588.15,3561.85 3610,3540 3610,3138.07 3596.2,3124.26 3596.2,3045.74 3600,3041.93 3600,2928.07 3596.2,2924.26 3596.2,2845.74 3600,2841.93 3600,2765 3626,2739 3742,2739 3863,2860 3971,2860 3995,2836 3995,2490 U4.3 ; 3553,3555 3553,2739 3690,2602 3690,2387.15 3738.15,2339 C20.2 ; R11.1 1415,2835 1485,2765 1513.15,2765
  Bottom Layer w10: 1179,2500 1179,2620.14 L1.2
  Bottom Layer w16: 1179,2500 1209,2470 v1(1920,2470)
AGND: C13.1 C14.1 C15.1 C23.2 C25.1 C26.1 C28.1 D2.2 D4.2 D6.2 U2.37 U2.40 U2.41 U2.47 U3.2 | length 6691.8
  Top Layer w10: C26.1 1496.65,3776.85 1511,3762.5 1511,3679 1611,3579 1698,3579 1837.5,3439.5 ; C25.1 1769,3776.85 C28.1 1931,3776.85 1932,3775.85 1932,3437 1907.5,3412.5 1864.5,3412.5 1837.5,3439.5 ; D2.2 2242.58,3348.49 2242.58,3057.94 2241,3056.36 2150,3056.36 1999.51,3206.85 C13.1 1850,3206.85 1837.5,3219.35 1837.5,3439.5 ; U2.47 2491.42,2835.92 2456.42,2870.92 2456.42,3332.49 D4.2 ; U2.41 U2.40 ; U2.37 2688.27,2752 2687.27,2751 2630.21,2751 2629.21,2752 U2.40 ; D6.2 2629.21,3210.28 U2.40 ; C15.1 C14.1 3678.85,2838 3800,2838 3872,2910 U3.2 4016.3,2990.71 C23.2
  Bottom Layer w10: D2.2 D4.2 D6.2 3011.06,3180 3291,3180 3561,2910 U3.2
CS1: R8.2 U1.62 U5.1 | length 1479.3
  Top Layer w10: U1.62 2358.73,1811.73 2377,1830 v1(2385,1830) ; U5.1 3014.61,1873.39 3050,1838 3050,1804 ; v1(2973,1727) 3050,1804 ; R8.2 3279.53,1775.53 3266,1762 3063.22,1762 3050,1775.22 3050,1804
  Bottom Layer w10: v1(2385,1830) 2870,1830 v1(2973,1727)
CS2: R9.2 U1.61 U6.1 | length 2930.9
  Top Layer w10: v1(2184.13,1631.13) 2184.13,1776.55 2239,1831.42 U1.61 ; U6.1 2938,2588.38 2938,2682 2960.47,2704.47 2994.54,2704.99 3020.03,2680.27 3032.6,2680.27 3105.87,2607 3266,2607 3282,2591 3282,2315.47 R9.2 3279.53,2213.47 3340,2153 v1(3340,1675)
  Bottom Layer w10: v1(2184.13,1631.13) 2228,1675 v1(3340,1675)
D_CLK: J4.1 U1.14 | length 556.3
  Top Layer w10: v1(2525,1535) 2511,1521 2511,1392.48 J4.1 ; U1.14 2633.27,1541 2654.27,1520 v1(2670,1520)
  Bottom Layer w10: v1(2525,1535) 2659.27,1535 v1@2670,1524.27
D_DATA: J4.3 U1.13 | length 478.9
  Top Layer w10: J4.3 2636,1313.74 2652.08,1329.82 2652.08,1452.92 2613.58,1491.42 U1.13
D_RES: J4.7 U1.12 | length 762.1
  Top Layer w10: J4.7 2494,1157.26 2495,1345 2618.6,1345 2636.08,1362.48 2636.08,1422.48 2593.9,1464.66 U1.12
D_SC: J4.10 U1.11 | length 852.8
  Top Layer w10: v1(2557,1465.5) 2574.21,1482.71 U1.11 ; J4.10 2822,1077.52 2850,1105.52 v1(2850,1195)
  Bottom Layer w10: v1(2557,1465.5) 2827.5,1195 v1(2850,1195)
DGND: C2.1 C8.1 C9.1 C11.1 C12.1 C18.1 C19.1 C20.1 C21.1 C24.1 C27.1 C29.1 C33.2 D8.2 D10.2 J1.4 J3.10 J4.2 J5.4 R1.1 R12.1 R13.1 R23.2 R24.2 U1.9 U1.20 U1.25 U1.41 U1.45 U1.52 U1.55 U1.56 U2.4 U2.16 U2.20 U2.21 U2.22 U4.2 U5.4 U6.4 X1.2 X2.2 | length 15472
  Top Layer w10: R24.2 1214.53,2200.87 R23.2 1234.53,2310 C18.1 1406.85,2450 ; C11.1 1406.85,2450 ; R12.1 1889,3011.47 1889,2896 1895,2890 1895,2830.32 1911.32,2814 1911.32,2751 1910.06,2749.75 1762.5,2749.75 1745.28,2732.52 X1.2 1811.42,2708.58 1831.7,2688.3 1831.7,2674 ; C19.1 1712.32,2370.47 1820.47,2370.47 R13.1 ; R1.1 1891.85,1071.85 C9.1 2052,1071.85 2055,1074.85 2055,1208 ; v1(1873.5,2268) 1873.5,2305.5 1865.94,2313.06 R13.1 ; v1(2065,2130) 2065,2164.35 2087.5,2186.85 C2.1 2169,2141.51 2169,1980.34 2123.66,1935 2123.89,1934.97 2167.66,1929.84 2190,1929.84 ; v1(2130,1880) 2130,1879.84 2135,1874.84 2190,1929.84 ; v1(2219.46,2199.46) 2219.46,2025.54 2236.42,2008.58 U1.52 ; v1@2235,1870 v1(2220,1870) 2215,1870 2168.13,1823.13 2168.13,1722.98 2147,1701.85 C29.1 2069.35,1701.85 2055,1687.5 2055,1208 ; U1.55 U1.56 2190,1929.84 ; U1.45 2436.42,2065.45 2450.32,2051.54 2450.32,2029.68 2459.5,2020.5 2531.88,2020.5 2558.21,2046.83 2558.21,2061.79 2531.87,2088.13 2527.84,2088.13 2515,2100.97 2515,2114.57 2515.16,2114.73 U1.41 2515.16,2242.66 2537.82,2265.32 2537.82,2397.68 2530.79,2404.71 U2.16 2530.79,2514.79 ; 2530.79,2634.21 2530.79,2550 ; 2534.16,2518.16 2530.79,2514.79 ; U1.9 2534.84,1615.96 2472,1553.12 2472,1110 ; U1.20 2854.42,1831.42 ; U1.25 2838.66,1929.84 2866,1902.5 2866,1843 2854.42,1831.42 ; J5.4 2935,1325 2910,1325 2865,1370 2865,1390 ; U5.4 2900,1796.61 2865,1761.61 2865,1390 ; U6.4 2932,2511.61 2836.39,2416 2770,2416 ; 3065,2730 3065,2670.5 3112.5,2623 3423.06,2623 D10.2 3541.06,2505 C21.1 3636.85,2395 3631.85,2390 C20.1 ; J1.4 3100,2745 3087.5,2732.5 2950,2732.5 2920,2702.5 2920,2566 2770,2416 ; C33.2 3390,1510 3390,2031.06 D8.2 3608.94,2250 3630.85,2250 3631.85,2251 C20.1 ; C24.1 3881.85,2276.85 ; U4.2 3881.85,2276.85 ; 1406.85,2450 1419.35,2437.5 1584.35,2437.5 1646.85,2500 C12.1 1691.85,2495 1821.85,2495 C27.1 ; 1831.7,2674 1831.7,2648.3 1866.85,2613.15 C27.1 ; 1831.7,2674 1902,2674 1936.58,2708.58 X2.2 1965.28,2625 2008,2582.28 2008,2475.03 2075,2408.03 2287.53,2408.03 2311.34,2431.84 2311.34,2646.75 2328.8,2664.21 U2.4 2444,2664.21 2470.74,2637.47 2552.53,2637.47 2614,2576 2614,2565.09 2649.09,2530 2648.9,2530 U2.22 ; R13.1 1865.94,2432 1866.85,2432.91 C27.1 ; 2055,1208 2262.5,1208 2280,1190.5 2280,1147.52 2345,1082.52 J3.10 2391.99,1075 2463.37,1075 2472,1083.63 2472,1110 ; 2472,1110 2637,1110 2671,1144 2671,1391.48 J4.2 ; 2530.79,2514.79 2530.79,2550 ; 2530.79,2550 2531.63,2550.84 2585.07,2550.84 2609.53,2526.38 U2.20 U2.21 U2.22 ; U2.22 2650,2446.58 2650,2416 2770,2416 ; J4.2 2862.52,1392.48 2865,1390 ; J4.2 2723,1392.48 2723,1681 2798,1756 2798,1775 2854.42,1831.42 ; C20.1 3678.85,2243 3848,2243 3881.85,2276.85
  Bottom Layer w10: v1(1873.5,2268) 2011.5,2130 v1(2065,2130) 2150,2130 v1(2219.46,2199.46) ; v1(2130,1880) 2130,1875 2135,1880 2145,1870 v1(2220,1870) ; J5.4 3064,1313.74 3075.26,1325 C33.2
DREQ: U1.3 U2.8 | length 1046
  Top Layer w10: v1(2398.32,2030) 2398.32,2018.29 2380.04,2000 2380.04,1954.96 2380,1955 2380,1933.24 2413.24,1900 2415,1900 2415,1850.91 2421,1844.91 2421,1815.09 2415,1809.09 2415,1779.28 2416.73,1777.54 U1.3 ; U2.8 2413.15,2585 v1(2470,2585)
  Bottom Layer w10: v1(2398.32,2030) 2398.32,2199.62 2523.68,2324.97 2523.68,2522.79 2470,2576.47 v1(2470,2585)
GBUF: D3.2 D4.1 J2.2 R15.2 U2.42 | length 3360
  Top Layer w10: R15.2 v1(1885.06,3691) ; D3.2 2563.58,3812.49 2563.58,3147.51 D4.1 2589.84,3014.1 U2.42 ; v1(3675,3540) 3675,3528.43 3693.43,3510 J2.2
  Bottom Layer w10: v1(1885.06,3691) 2334.94,3691 D3.2 2737.94,3866.06 3073.57,3530.43 3083.15,3540 v1(3675,3540)
GPIO: R12.2 U2.9 U2.10 U2.33 U2.34 | length 2295.7
  Top Layer w10: R12.2 1737.5,3319.53 1783,3274.03 1783,3155 2065,2873 2065,2825.78 2064,2824.78 2064,2564.37 2080.54,2547.84 2080.54,2543.79 2081,2543.33 2081,2490.37 2080.54,2489.91 2080.54,2437.49 2081,2437.03 2081,2431 2180,2431 2199,2450 2199,2484 2230,2515 2230,2576 v1(2240,2586) 2240,2671 2308,2739 2437.71,2739 2512.5,2664.21 2656.3,2664.21 2665.09,2673 2738.53,2673 U2.33 U2.34 ; v1(2348,2586) 2387.9,2546.1 U2.10 U2.9
  Bottom Layer w10: v1(2240,2586) v1(2348,2586)
LEDA: TR_LAN.9 U1.24 | length 2071
  Top Layer w10: v1(2655,1910) 2745.31,1910 U1.24
  Bottom Layer w10: TR_LAN.9 1336.53,2029.05 2242.95,2029.05 ; v1(2655,1910) 2672,1910 2672.16,1910.16 v1@2675,1907.32 ; v1@2677.84,1910.16 v1@2675,1907.32 ; 2242.95,2029.05 2308,2029.05 2439.05,1898 ; 2242.95,2029.05 2374,1898 2439.05,1898 ; 2439.05,1898 v1@2665.68,1898 ; 2439.05,1898 2440.05,1897 2664.68,1897 v1@2665.68,1898 ; v1@2665.68,1898 v1@2675,1907.32
LEDB: TR_LAN.8 U1.23 | length 1516.1
  Top Layer w10: U1.23 2799.03,1890.47 2819.5,1870 v1(2830,1870)
  Bottom Layer w10: TR_LAN.8 1698.23,1922 2322,1922 2374.5,1869.5 2628.8,1869.5 ; v1(2830,1870) v1@2820.5,1870 ; 2628.8,1869.5 2629.3,1870 v1@2820.5,1870 ; 2628.8,1869.5 2637.13,1861.17 2811.67,1861.17 v1@2820.5,1870
LEFT: R14.2 U2.46 | length 2275.6
  Top Layer w10: R14.2 1149,3875.21 1148,3874.21 1148,3295 1149,3294 1225,3294 v1(1304,3215) ; U2.46 v1(2511.1,2907.9)
  Bottom Layer w10: v1(1304,3215) 2204,3215 v1(2511.1,2907.9)
MCLR: C1.1 J5.3 R5.1 U1.7 | length 2172.2
  Top Layer w10: R5.1 1850,1523.11 1866.36,1539.47 1878,1539.47 1879,1540.47 1879,1736.85 C1.1 1852,1736.85 v1(1852,1650) ; v1(2395,1615) 2463,1615 2495.47,1647.47 U1.7
  Bottom Layer w10: v1(1852,1650) 1911.5,1590.5 2215.55,1590.5 ; J5.3 2795,1375 2795,1454.09 2796,1455.09 2796,1553 2700,1649 2418,1649 ; 2215.55,1590.5 2359.5,1590.5 2384,1615 v1(2395,1615) 2395,1626 2418,1649 ; 2215.55,1590.5 2274.05,1649 2418,1649
NC: R10.1 U2.26 | length 2809.5
  Top Layer w10: R10.1 1150,3260.47 1129,3239.47 1129,2490 1194,2489 1225,2520 v1(1225,2605) ; U2.26 2808.42,2526.42 v1(2835,2553)
  Bottom Layer w10: v1(1225,2605) 1292,2605 1367,2680 2491.46,2680 2508.46,2663 2551.54,2663 2568.54,2680 2708,2680 v1(2835,2553)
NetC3_2: C3.2 C4.1 R2.2 | length 1144.5
  Top Layer w10: R2.2 3184.76,2736.24 3200,2721 3496,2721 3516,2741 3516,3250.85 C4.1 3460,3203.67 3465.1,3198.58 3465.1,3143.15 C3.2
NetC5_2: C5.2 R3.1 | length 301.9
  Top Layer w10: R3.1 3310.47,2742 3311.47,2741 3388.5,2741 3410,2762.5 3410,2882.15 3411,2883.15 C5.2
NetC6_2: C6.2 R4.1 | length 1405.5
  Top Layer w10: R4.1 2940.94,3648.09 2961,3668.15 C6.2
NetC7_2: C7.2 C22.2 U2.38 U2.43 U2.45 | length 1274
  Top Layer w10: C7.2 2081,2570 2080,2571 2080,2818.15 C22.2 2137,2863.15 2190.15,2810 v1(2205,2810) ; v1(2530,2715) 2530,2749 ; U2.45 2530.79,2752 2570.16,2751 ; U2.43 2570.16,2751 ; U2.38 2668.58,2813.58 2669,2814 2705,2814 2705,2737.5 2689.5,2722 2585.66,2722 2570.16,2737.5 2570.16,2751
  Bottom Layer w10: v1(2205,2810) 2445,2810 2447.5,2812.5 2530,2730 v1(2530,2715)
NetC8_2: C8.2 U1.10 | length 841
  Top Layer w10: v1(2050,1880) 2052,1882 2061,1882 2079,1900 2079,2040.3 2080,2041.3 C8.2@2123.66,2041.3 ; v1(2510,1785) 2521.53,1785 2554.53,1752 U1.10
  Bottom Layer w10: v1(2050,1880) 2065,1880 2102.5,1842.5 2181.5,1842.5 2249,1775 2259,1785 v1(2510,1785)
NetC10_2: C10.2 U5.8 | length 526.8
  Top Layer w10: v1(3000,2145) 3000,2090 3020,2070 C10.2 ; U5.8 3222,1873.39 v1(3222,1970)
  Bottom Layer w10: v1(3000,2145) 3020,2145 3040,2125 3078,2125 3222,1981 v1(3222,1970)
NetC15_2: C15.2 C21.2 C33.1 D7.1 D9.1 U3.1 U4.1 | length 2677.7
  Top Layer w10: C15.2 C15.2@3739,3084.15 ; C21.2 3743.15,2617.56 U3.1 ; U4.1 U4.1@3935,2240
  Top Layer w16: C33.1 3683.94,1503.94 D7.1 D9.1 3915,1830 3935,1850 U4.1 ; v1(3739,2960) C15.2@3739,3084.15 ; C21.2 3743.15,2396.85 3760,2380 3975,2380 3990,2365 3990,2295 U4.1@3935,2240
  Bottom Layer w10: v1(3739,2960) 3962.5,2960 3979,2943.5 3979,2811 3978,2810 U3.1
NetC16_2: C16.2 U6.8 | length 396.9
  Top Layer w10: C16.2 3043.15,2558.53 3073,2588.38 U6.8
NetC17_2: C17.2 C19.2 L1.1 R21.1 R22.1 TR_LAN.1 | length 2405.9
  Top Layer w10: L1.1 1268.15,2884.49 C17.2 1268.15,2500.15 1115.28,2347.28 1115.28,1852.22 1142.5,1825 1533.5,1825 1546,1837.5 1546,1895.5 1562.5,1912 1626.35,1912 TR_LAN.1 1692,1903.02 1692,2027 1680,2039 R21.1 1758.15,2095.2 ; C19.2 1758.15,2095.2 ; R22.1 1758.15,2095.2
NetC18_2: C18.2 R19.1 R20.1 | length 408.8
  Top Layer w10: R19.1 1441.7,2095.2 1459,2112.5 ; R20.1 1460,2095.2 1459,2096.2 1459,2112.5 ; C18.2 1513.15,2265 1459,2210.85 1459,2112.5
NetC25_2: C25.2 R17.2 | length 322.6
  Top Layer w10: R17.2 1594.51,3648.8 1594.51,3822.68 C25.2
NetC26_2: C26.2 R18.2 | length 311.4
  Top Layer w10: R18.2 1378,3635.29 1378,3836.19 C26.2
NetC28_2: C28.2 R15.1 | length 777.2
  Top Layer w10: C28.2 1797.64,3883.15 1724,3809.51 1612,3809.51 1610.51,3808.02 1610.51,3705.02 1837.5,3478.04 R15.1
NetC32_7: R23.1 TR_LAN.7 | length 918.2
  Top Layer w10: R23.1 1155.47,2194.19 1131.28,2170 1131.28,2123 1132.72,2121.56 1199.44,2121.56 1355,1966 v1(1355,1950)
  Bottom Layer w10: v1(1355,1950) 1358,1950 1421.05,2013.05 1707.19,2013.05 TR_LAN.7
NetC32_10: R24.1 TR_LAN.10 | length 123.4
  Top Layer w10: R24.1 1179.41,2067.88 TR_LAN.10
NetD1_2: D1.2 D2.1 J2.4 R14.1 R17.1 | length 4238.2
  Top Layer w10: R14.1 1195,3676 1300,3571 1577.73,3571 1603.71,3545.03 R17.1 1639.23,3523.77 v1(1718,3445) ; D2.1 2167,3131.94 2167,3823.06 D1.2 ; J2.4 v1(3996.57,3905)
  Bottom Layer w10: v1(1718,3445) 1718,3601 1988.06,3871.06 D1.2 2248.94,3905 v1(3996.57,3905)
NetD6_1: D6.1 J2.3 R16.1 R18.1 | length 3791.6
  Top Layer w10: R16.1 1338.01,3478.04 1405,3545.03 R18.1 1549.97,3545.03 v1(1634,3461) ; D6.1 2843,3131.94 2843,3424 2762,3505 2762,3723 2775,3736 3551.39,3736 3669,3618.39 J2.3
  Bottom Layer w10: v1(1634,3461) 1788,3307 2591.94,3307 D6.1
NetD7_2: D7.2 D8.1 ZS1.2 | length 838.6
  Bottom Layer w16: D8.1 3528.94,1720 3876.06,1720 D7.2 3835,1478.94 ZS1.2
NetD9_2: D9.2 D10.1 ZS1.1 | length 1129.4
  Top Layer w16: ZS1.1 3935,1788.94 D9.2
  Bottom Layer w10: D10.1 3502.13,2303.94
  Bottom Layer w16: 3502.13,2303.94 D9.2
NetJ1_6: J1.6 J1.7 J1.8 J1.9 | length 900
  Top Layer w10: J1.6 J1.7
  Bottom Layer w10: J1.9 J1.6 ; J1.8 J1.7
NetR6_1: R6.1 X1.1 | length 282.1
  Top Layer w10: R6.1 1640.95,2873 1618,2850.05 1618,2709.58 1619,2708.58 X1.1
NetR7_2: R7.2 X2.1 | length 271.8
  Top Layer w10: X2.1 1900.9,2708.58 1927.32,2735 1927.32,2829.09 1919.53,2836.88 R7.2
NetR13_2: R13.2 U2.3 | length 774.8
  Top Layer w10: R13.2 v1(1925,2400) ; v1(2235,2445) 2292.17,2502.17 2292.17,2663.57 2312.5,2683.9 U2.3
  Bottom Layer w10: v1(1925,2400) 2190,2400 v1(2235,2445)
OSC: U1.39 X1.3 | length 1563.3
  Top Layer w10: v1(1708,2637.47) 1708,2780.42 X1.3 ; U1.39 2554.53,2286.03 v1(2603,2334.5)
  Bottom Layer w10: v1(1708,2637.47) 2549.03,2637.47 2574,2612.5 2574,2561.91 2606.16,2529.75 2606.16,2337.66 v1(2603,2334.5)
PGC: J5.1 U1.42 | length 2314.8
  Top Layer w10: v1(2495.47,2058.03) U1.42
  Bottom Layer w10: v1(2495.47,2058.03) 2472.42,2034.97 2472.42,1930.08 2486.7,1915.8 2609.89,1915.8 2650.49,1956.4 3177.6,1956.4 3376,1758 3376,1137.5 3316.02,1077.52 J5.1
PGD: J5.2 U1.37 | length 1385.2
  Top Layer w10: U1.37 2593.9,2095 2603.9,2085 2812.5,2085 2836.13,2061.37 2836.13,2005.37 2904,1937.5 2904,1852.5 2817.02,1765.52 2817.02,1502.02 2785,1470 v1(2760,1470)
  Bottom Layer w10: v1(2760,1470) 2760,1333.26 2759,1332.26 2860.26,1231 2864.91,1231 2935,1160.91 J5.2
RBIAS: R1.2 U1.53 | length 1453.1
  Top Layer w10: R1.2 1799,1401 1799,1904.51 1932.23,2037.74 1932.23,2071.23 2081,2220 2172.26,2220 2172.26,2170 2195.37,2146.89 2195.37,2006.03 2212.5,1988.9 U1.53
RCAP: C13.2 U2.44 | length 2295.8
  Top Layer w10: C13.2 2005,3313.15 2005,3900 2021,3916 2287.5,3916 2547.58,3655.92 2547.58,3362.5 2472.42,3287.35 2472.42,3057.94 2550.47,2979.89 U2.44
RIGHT: R16.2 U2.39 | length 1931.1
  Top Layer w10: R16.2 1195,3542 1207,3530 v1(1275,3530) ; U2.39 2648.9,2878.9 v1(2677,2907)
  Bottom Layer w10: v1(1275,3530) 1275,3524 1549,3250 2233,3250 2576,2907 v1(2677,2907)
SCK: U1.34 U2.28 U5.6 U6.6 | length 3368
  Top Layer w10: U1.34 2652.95,2192 2653.95,2193 2866,2193 2884,2175 2884,2028.28 3070,1842.28 3070,1820.4 3111.68,1778.72 3248.27,1778.72 3249.55,1780 3249.55,1821 3248.34,1822.2 U5.6 3141.3,1822.2 3123,1840.5 3123,2368.46 3249.54,2495 3249.54,2527 3239.34,2537.2 U6.6 3100,2537.2 3076,2513.2 3076,2286 3045,2255 v1(2980,2255) ; U2.28 2778,2565.79 2853,2640.79 v1(2853,2793)
  Bottom Layer w10: v1(2853,2793) 3012.5,2793 3025,2780.5 3025,2300 v1(2980,2255)
SD_CD: J3.5 U1.16 | length 928.1
  Top Layer w10: v1(2100,1250) 2116,1250 2126,1240 J3.5 ; v1(2672.64,1597.85) U1.16
  Bottom Layer w10: v1(2100,1250) 2116,1250 2463.85,1597.85 v1(2672.64,1597.85)
SD_CS: J3.1 U1.2 | length 559.3
  Top Layer w10: J3.1 2275,1397.48 2288,1410.48 2288,1699 2341,1752 2396.05,1752 2397.05,1751 U1.2
SD_DO: J3.4 U1.63 | length 821.4
  Top Layer w9: 2249.55,1779.09 2262.5,1792.05 U1.63
  Top Layer w10: 2249.55,1779.09 2249.55,1574.11 2118.98,1443.54 2118.98,1351 2119.98,1350 2313.74,1350 2345,1318.74 J3.4
SD_IN: J3.2 U1.1 | length 320.2
  Top Layer w10: U1.1 2377.36,1663.19 2359,1644.83 2359,1569.47 2384.47,1544 J3.2
SD_SCK: J3.3 U1.64 | length 1157.9
  Top Layer w9: U1.64@2272,1772.36 U1.64
  Top Layer w10: J3.3 2282.26,1318.74 2314,1287 2455,1287 2456,1288 2456,1366 2455.6,1366.4 2136,1366.4 2134.98,1367.42 2134.98,1427.54 2272,1564.56 U1.64@2272,1772.36
SD_WD: J3.6 U1.15 | length 1331
  Top Layer w10: v1(2094,1627) 2094,1300 2108,1286 2259,1286 2305,1240 J3.6 ; v1(2590,1780) 2613.86,1780 2652.95,1740.91 U1.15
  Bottom Layer w10: v1(2094,1627) 2201.5,1734.5 2559.5,1734.5 2590,1765 v1(2590,1780)
SI: U1.36 U2.29 U5.5 U6.5 | length 2248.1
  Top Layer w10: U1.36 2613.58,2219 2697.58,2303 v1(2751,2303) 2887.5,2303 2902,2288.5 2902,2033 2910,2025 3088.5,2025 3095,2031.5 ; v1@2640,2585.47 2645.47,2580 v1(2650,2580) 2655.47,2585.47 U2.29 ; U5.5 3120.39,1796.61 3095,1822 3095,2031.5 ; U6.5 3112.5,2511.61 3095,2494.11 3095,2031.5
  Bottom Layer w10: v1@2640,2585.47 2645.47,2580 v1(2650,2580) 2707.56,2580 2713.03,2585.47 2751,2547.5 v1(2751,2303)
SO: U2.30 U5.2 | length 1170.3
  Top Layer w10: v1(2680,2637) 2711.84,2605.16 U2.30 ; v1(2835.16,2139.84) 2868,2107 2868,2020 2920,1968 2920,1848.79 2921,1847.79 U5.2
  Bottom Layer w10: v1(2680,2637) 2640,2637 2612.5,2609.5 2612.5,2557 2625.5,2544 2664.91,2544 2669.91,2549 2720,2549 2726,2543 2726,2450 2715,2439 2715,2260 v1(2835.16,2139.84)
SO1: U1.35 U6.2 | length 892.4
  Top Layer w10: U1.35 2633.27,2200.42 2688.85,2256 v1(2825.04,2256) ; U6.2 3012.3,2562.79 3021.2,2571.69 3021.2,2605.08 2985,2641.28 v1(2985,2655)
  Bottom Layer w10: v1(2825.04,2256) 2825.04,2452.76 2985,2612.72 v1(2985,2655)
SW1: J1.1 R2.1 U1.17 | length 2406.9
  Top Layer w10: v1(2584.5,1952) 2584.5,1838 2650.14,1772.36 U1.17 ; R2.1 3200,2844.29 J1.1
  Bottom Layer w10: v1(2584.5,1952) 2604.9,1972.4 2755.4,1972.4 3355,2572 3355,3085 3310,3130 J1.1
SW2: J1.2 R3.2 | length 530.2
  Top Layer w10: J1.2 3237,3193 3237,2925 3369.53,2792.47 R3.2
SW3: J1.3 R4.2 | length 501.4
  Top Layer w10: R4.2 3000,2900 3061,2961 3061,3191 J1.3
TEST: R11.2 U2.32 | length 1872
  Top Layer w10: R11.2 1450,3319.53 1469,3300.53 v1(1469,3153) ; U2.32 2800,2644.53 2817,2661.53 v1(2817,2696)
  Bottom Layer w10: v1(1469,3153) 1926,2696 2498.09,2696 2515.09,2679 2544.91,2679 2561.91,2696 v1(2817,2696)
TPIN+: R20.2 TR_LAN.4 U1.47 | length 1600.8
  Top Layer w10: TR_LAN.4 1423.9,1901.94 1591,2069.04 v1(1591,2170) R20.2 ; U1.47 2397.05,2333.05 v1(2425,2361)
  Bottom Layer w10: v1(1591,2170) 1782,2361 v1(2425,2361)
TPIN-: R19.2 TR_LAN.5 U1.46 | length 2191
  Top Layer w10: R19.2 1294,2129 1294,2061.91 1391,1964.91 1391,1921.71 TR_LAN.5 ; U1.46 2416.73,2278.23 v1(2437,2298.5)
  Bottom Layer w10: TR_LAN.5 1289.29,1820 1243.5,1820 1226,1837.5 1226,2013 1258.05,2045.05 2183.55,2045.05 v1(2437,2298.5)
TPOUT+: R22.2 TR_LAN.2 U1.51 | length 1292.3
  Top Layer w10: TR_LAN.2 1633.42,1825 1688,1825 1891,2028 1891,2145 1916,2170 ; R22.2 1916,2170 ; U1.51 2250,2028.27 2235.46,2042.8 2235.46,2115 2237.62,2115 2269,2146.38 2269,2226 2254,2241 1987,2241 1916,2170
TPOUT-: R21.2 TR_LAN.3 U1.50 | length 1510.6
  Top Layer w10: TR_LAN.3 1503.82,1940.22 1627,2063.4 1627,2150 1647,2170 R21.2 1680,2267 1725,2312 1725,2353.47 1726,2354.47 1791,2354.47 1837,2308.47 1837,2245 1850,2232 1914,2232 1941,2259 2266,2259 2285,2240 2285,2139.75 2252,2106.75 2252,2056 2260.05,2047.95 U1.50
VS_CLK: U2.18 X2.3 | length 1054.4
  Top Layer w10: X2.3 1965.28,2773 2035.98,2702.3 v1@2035.98,2520 ; U2.18 v1(2570.16,2514.84)
  Bottom Layer w10: v1@2031.11,2533.89 2031.11,2524.87 2031.35,2524.63 2358.63,2524.63 2389.13,2555.13 2389.13,2604.13 2406.47,2621.47 2497,2621.47 2555,2563.47 2555,2510 2559.84,2514.84 v1(2570.16,2514.84)
  other v1: 2045,2520
VS_CS: U1.5 U2.23 | length 984.5
  Top Layer w10: U1.5 2456.1,1914.1 v1@2501,1959 ; U2.23 2668.58,2491.58 v1(2690,2513)
  Bottom Layer w10: v1@2501,1959 2690,2148 v1(2690,2513)
  other v1: 2515,1965
xDCS: U1.4 U2.13 | length 802.4
  Top Layer w10: U1.4 2437,1700.11 2437,1963.92 v1(2436.42,1964.5) ; U2.13 2471.73,2422.27 2519,2375 2519,2280 v1@2472,2233
  Bottom Layer w10: v1(2436.42,1964.5) 2436.42,2197.42 v1@2472,2233
  other v1: 2475,2225
pads on no net: C29.2 D5.2 J2.1 J2.10 J2.MH1 J2.MH2 J3.7 J3.8 J4.4 J4.5 J4.6 J4.8 TR_LAN. TR_LAN.6 U1.6 U1.8 U1.18 U1.21 U1.22 U1.27 U1.28 U1.29 U1.30 U1.31 U1.32 U1.33 U1.40 U1.43 U1.44 U1.58 U1.59 U1.60 U2.1 U2.2 U2.5 U2.7 U2.11 U2.12 U2.15 U2.17 U2.24 U2.25 U2.27 U2.31 U2.35 U2.36 U2.48 U5.3 U6.3

## Polygon pours and split planes (outlines as drawn)
AGND on Top Layer "Bottom Layer-No Net" (solid, pour order 0): 1025,4025 4125,4025 4125,975 1025,975
AGND on Bottom Layer "Bottom Layer-No Net" (solid, pour order 2): 1025,4025 4125,4025 4125,975 1025,975

## Text inside footprints (layer, text, board x,y; h text height)
C33: Top Overlay "+" at 3675.15,1295.99 h59.06
J1: Top Overlay "4" at 3080,3149.68 h49.6 r90; Top Overlay "3" at 3080,3250 h49.6 r90; Top Overlay "2" at 3180.32,3250 h49.6 r90; Top Overlay "1" at 3180.32,3149.68 h49.6 r90